# Altium PCB PCB1.PcbDoc (part 1 of 4)
Units mil, origin at the board's own origin, x right, y up, seen from the top; angles counter-clockwise.
Board outline 6000 x 4000 mil, 2 copper layers (Top Layer, Bottom Layer); 7 components, 0 nets, 14 pads, 0 vias.
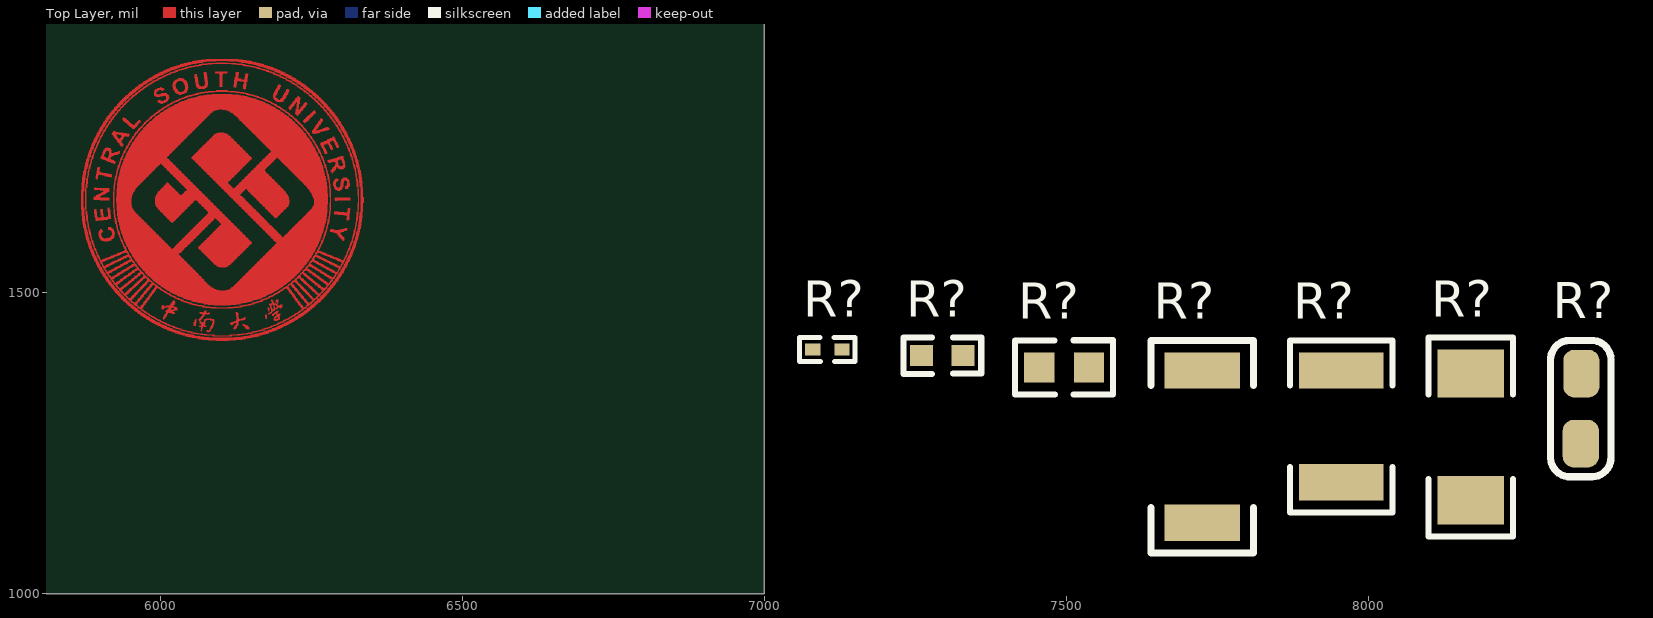
[diagram p0: Top Layer view]
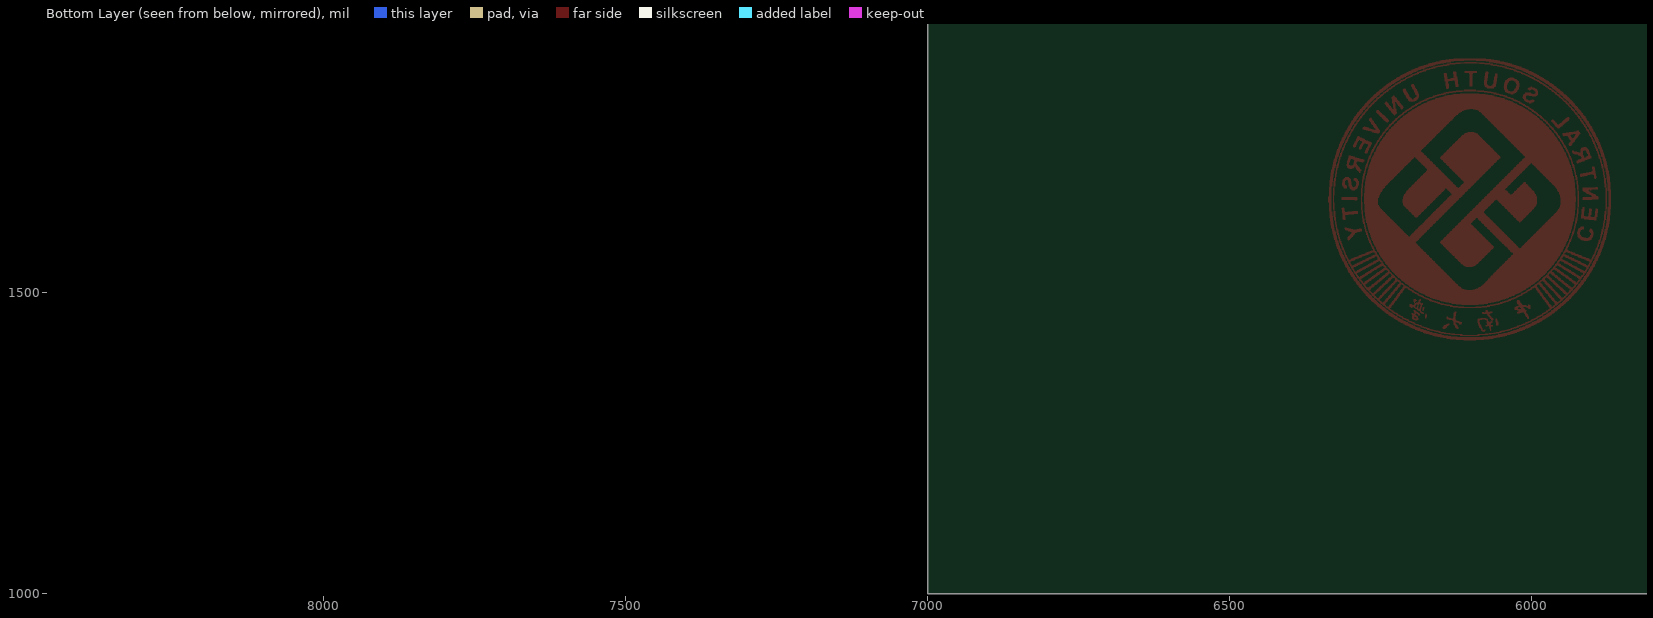
[diagram p1: Bottom Layer view, seen from below]

## Layer stack, top to bottom
Top Solder: solder mask 0.4, Solder Resist, Dk 3.5
Top Layer: signal copper 1.4
Dielectric 1: dielectric 12.6, FR-4, Dk 4.8
Bottom Layer: signal copper 1.4
Bottom Solder: solder mask 0.4, Solder Resist, Dk 3.5

## Board outline
1000,1000 7000,1000 7000,5000 1000,5000

## Design rules (kind name [scope] priority, off if disabled: settings)
Clearance [All] p1: gap=10 ignorepadtopadclearanceinfootprint=FALSE except(0: Arc-Hole Track-Hole SMDPad-Hole THPad-Hole Via-Hole Fill-Hole Poly-Hole Region-Hole Text-Hole)
PolygonConnect [All] p1: connectstyle=Relief reliefconductorwidth=10 reliefentries=4 polygonreliefangle="90 Angle" airgapwidth=10
RoomDefinition Sheet1 [InComponentClass('Sheet1')] p1: confinementstyle=ConfineIn formatcopy=TRUE lockcomponents=FALSE outline 7045,1055 8425,1055 8425,1535 7045,1535
RoutingVias [All] p1: holewidth=28 width=50 viastyle="Through Hole" minholewidth=28 minwidth=50 maxholewidth=28 maxwidth=50
SolderMaskExpansion [All] p1: expansion=4
Width [All] p1: maxlimit=10 minlimit=10 preferedwidth=10
30 further rules are at their usual default settings.

## Classes and differential pairs
component class Sheet1: R?

## Components (designator, comment, footprint, x,y, rotation, side; value= is the part's Value field where it differs from the comment)
R? "电阻" R2010 8170,1255 r90 top value=150R
R? "电阻" 120603 8355,1315 r90 top value=150R
R? "电阻" R1812 7955,1185 r90 top value=150R
R? "电阻" R0805 7455,1375 r0 top value=150R
R? "电阻" R2512 7725,1370 r90 top value=150R
R? "电阻" R0603 7260,1395 r0 top value=150R
R? "电阻" R0402 7080,1405 r0 top value=150R

## Footprints (in the part's own frame and the unit in brackets; to place one, negate y for a bottom-side part, rotate by r counter-clockwise, add the part's x,y. Pads: shape width x height; smd on the part's side, far side on the other; paste and mask are expansions set on the pad)
120603 [mil] "兼容"
  rrect60% 78.74x60 smd: 1(-66,3) 2(50,2)
  silkscreen extent -121,-47 105,53, body extent -71,-29 55,33, height 24
R0402 [mil] "1/16W"
  rect 25x20 smd: 1(0,0) 2(48.2,0)
  silkscreen extent -22,-20 70,20, body extent 5,-10 44,10, height 14
R0603 [mil] "1/10W"
  rect 38x35 smd: 1(0,0) 2(69,0)
  silkscreen extent -30,-31 99,30, body extent 4,-16 66,16, height 18
R0805 [mil] "1/8W"
  rect 50x50 smd: 1(0,0) 2(82.3,0.2)
  silkscreen extent -40,-45 122,45, body extent 1,-24 80,25, height 22
R1812 [mil]
  rect 60x140 smd: 1(0,0) 2(185,0)
  silkscreen extent -50,-85 235,85, body extent 3,-62 181,64, height 63
R2010 [mil]
  rect 80x110 smd: 1(-100,0) 2(110,0)
  silkscreen extent -160,-70 170,70, body extent -112,-53 124,54, height 24
R2512 [mil]
  rect 60x125 smd: 1(0,0) 2(-251.97,0)
  silkscreen extent -302,-85 50,85, body extent -260,-65 8,65, height 25

## Part data
R? R? R? R? R? R? R?: "Resistor", LatestRevisionDate=17-Jul-2002, LatestRevisionNote="Re-released for DXP Platform.", PackageDescription="Axial Device, Thru-Hole; 2 Leads; 0.3 in Pin Spacing", PackageReference=AXIAL-0.3, Published=8-Jun-2000, Publisher="Altium Limited"

## Nets (pads, with @x,y where several pads share a name; then routed paths per layer and width w, separated by ;. In a path a pad name is that pad's centre, name@x,y a point inside that pad or via, vN(x,y) a via of type N, cw(c..) or ccw(c..) an arc to the next point about the centre after c; other vN are vias at no path point)
pads on no net: R?.1 R?.2
copper on no net: | length 83929